# EAGLE board Circuit (EAGLE 9.7.0)

Size 180.86 x 137.98 mm. Coordinates in mm from the lower left corner, seen from the top.
Outline: 0,0 180.86,0 180.86,137.98 0,137.98 0,0
Copper layers (1*16): Top 0.035mm / dielectric 1.5mm / Bottom 0.035mm
Design rules "default": minimum track width 6mil, minimum drill 0.35mm, track to track 6mil, track to pad 6mil, pad to pad 6mil, via to via 6mil, smd to smd 6mil, copper to edge 40mil, drill to drill 6mil, minimum pad ring 10mil, minimum via ring 8mil, stop-mask expansion 4mil, vias tented up to drill 0mil, thermal gap 10mil

## Footprints (pad centres in the part's own frame; a part is rotated, then mirrored left to right if it is on the bottom)
HC-SR04 = drill 1.016 long: 1 -3.81,0; 2 -1.27,0; 3 1.27,0; 4 3.81,0
MOTOR = drill 1.118 pad 3.15 octagon: + 2.54,0; - -2.54,0
BATTERY-GENERIC = drill 1.118 pad 3.15 octagon: + 2.54,0; - -2.54,0
TSOP48 = drill 0.8: 1 -2.54,0; 2 0,0; 3 2.54,0
ARDUINO-UNO-R3-SHIELD = drill 1.016 pad 1.88: 3.3V 24.13,-2.54; 5V 24.13,0; A0 24.13,12.7; A1 24.13,15.24; A2 24.13,17.78; A3 24.13,20.32; A4 24.13,22.86; A5 24.13,25.4; AREF -24.13,-13.97; D2 -24.13,20.32; D3 -24.13,17.78; D4 -24.13,15.24; D5 -24.13,12.7; D6 -24.13,10.16; D7 -24.13,7.62; D8 -24.13,3.81; D9 -24.13,1.27; D10 -24.13,-1.27; D11 -24.13,-3.81; D12 -24.13,-6.35; D13 -24.13,-8.89; GND@0 24.13,2.54; GND@1 24.13,5.08; GND@2 -24.13,-11.43; IOREF 24.13,-7.62; NC 24.13,-10.16; RES 24.13,-5.08; RX -24.13,25.4; SCL -24.13,-19.05; SDA -24.13,-16.51; TX -24.13,22.86; VIN 24.13,7.62
DIP762W53P254L1969H508Q16B = drill 0.743 pad 1.343: 1 -3.81,8.89; 2 -3.81,6.35; 3 -3.81,3.81; 4 -3.81,1.27; 5 -3.81,-1.27; 6 -3.81,-3.81; 7 -3.81,-6.35; 8 -3.81,-8.89; 9 3.81,-8.89; 10 3.81,-6.35; 11 3.81,-3.81; 12 3.81,-1.27; 13 3.81,1.27; 14 3.81,3.81; 15 3.81,6.35; 16 3.81,8.89

## Placement (x,y rotation side)
DIST1  DISTANCE-SENSOR-4PINHC-SR04  [HC-SR04]  40.14,126.11 0 top
M4  MOTOR_HDR  [MOTOR]  140.4,97.92 0 top
M5  MOTOR_HDR  [MOTOR]  140.7,83.6 180 top
M6  MOTOR_HDR  [MOTOR]  168.92,97.84 0 top
M7  MOTOR_HDR  [MOTOR]  172.61,83.54 180 top
P1  BATTERYGENERIC  [BATTERY-GENERIC]  145.89,37.42 180 top
U2  IR-RECEIVERTSOP48  [TSOP48]  74.83,131.18 0 top
U3  IR-RECEIVERTSOP48  [TSOP48]  6.37,131.63 0 top
U4  ARDUINO-UNO-R3-SHIELD  [ARDUINO-UNO-R3-SHIELD]  55.77,29.84 270 top
U5  L293E  [DIP762W53P254L1969H508Q16B]  78.56,90.91 90 top

## Library data of the parts
DIST1 M4-M7 P1 U2-U5 = Tinkercad

## Nets
M4_+: M4.+ M6.-
M4_-: M4.- U5.14
M5_+: M5.+ U5.3
M5_-: M5.- M7.+
M6_+: M6.+ U5.11
M7_-: M7.- U5.6
P1+: P1.+ U5.1 U5.8 U5.9 U5.16
P1-: P1.- U5.4 U5.5 U5.12 U5.13
U4_5V: DIST1.1 U2.3 U3.3 U4.5V
U4_A2: U2.1 U4.A2
U4_A3: DIST1.3 U4.A3
U4_A4: DIST1.2 U4.A4
U4_A5: U3.1 U4.A5
U4_D8: U4.D8 U5.7
U4_D9: U4.D9 U5.2
U4_D10: U4.D10 U5.10
U4_D11: U4.D11 U5.15
U4_GND: DIST1.4 U2.2 U3.2 U4.GND@0 U4.GND@1 U4.GND@2

## Tracks (layer width: path | path; a pad name or v marks a point on that pad's centre or on a via)
M4_+  (1 unrouted)
M4_-  (1 unrouted)
M5_+  (1 unrouted)
M5_-  (1 unrouted)
M6_+  (1 unrouted)
M7_-  (1 unrouted)
P1+  (4 unrouted)
P1-  (4 unrouted)
U4_5V  (3 unrouted)
U4_A2  (1 unrouted)
U4_A3  (1 unrouted)
U4_A4  (1 unrouted)
U4_A5  (1 unrouted)
U4_D8  (1 unrouted)
U4_D9  (1 unrouted)
U4_D10  (1 unrouted)
U4_D11  (1 unrouted)
U4_GND  (5 unrouted)